# Altium PCB Controller.PcbDoc
Units mm, origin at the board's own origin, x right, y up, seen from the top; angles counter-clockwise.
Board outline 60.32 x 65.41 mm, 2 copper layers (Top Layer, Bottom Layer); 34 components, 35 nets, 142 pads, 0 vias.
Unrouted connection lines stored in the file: 78.
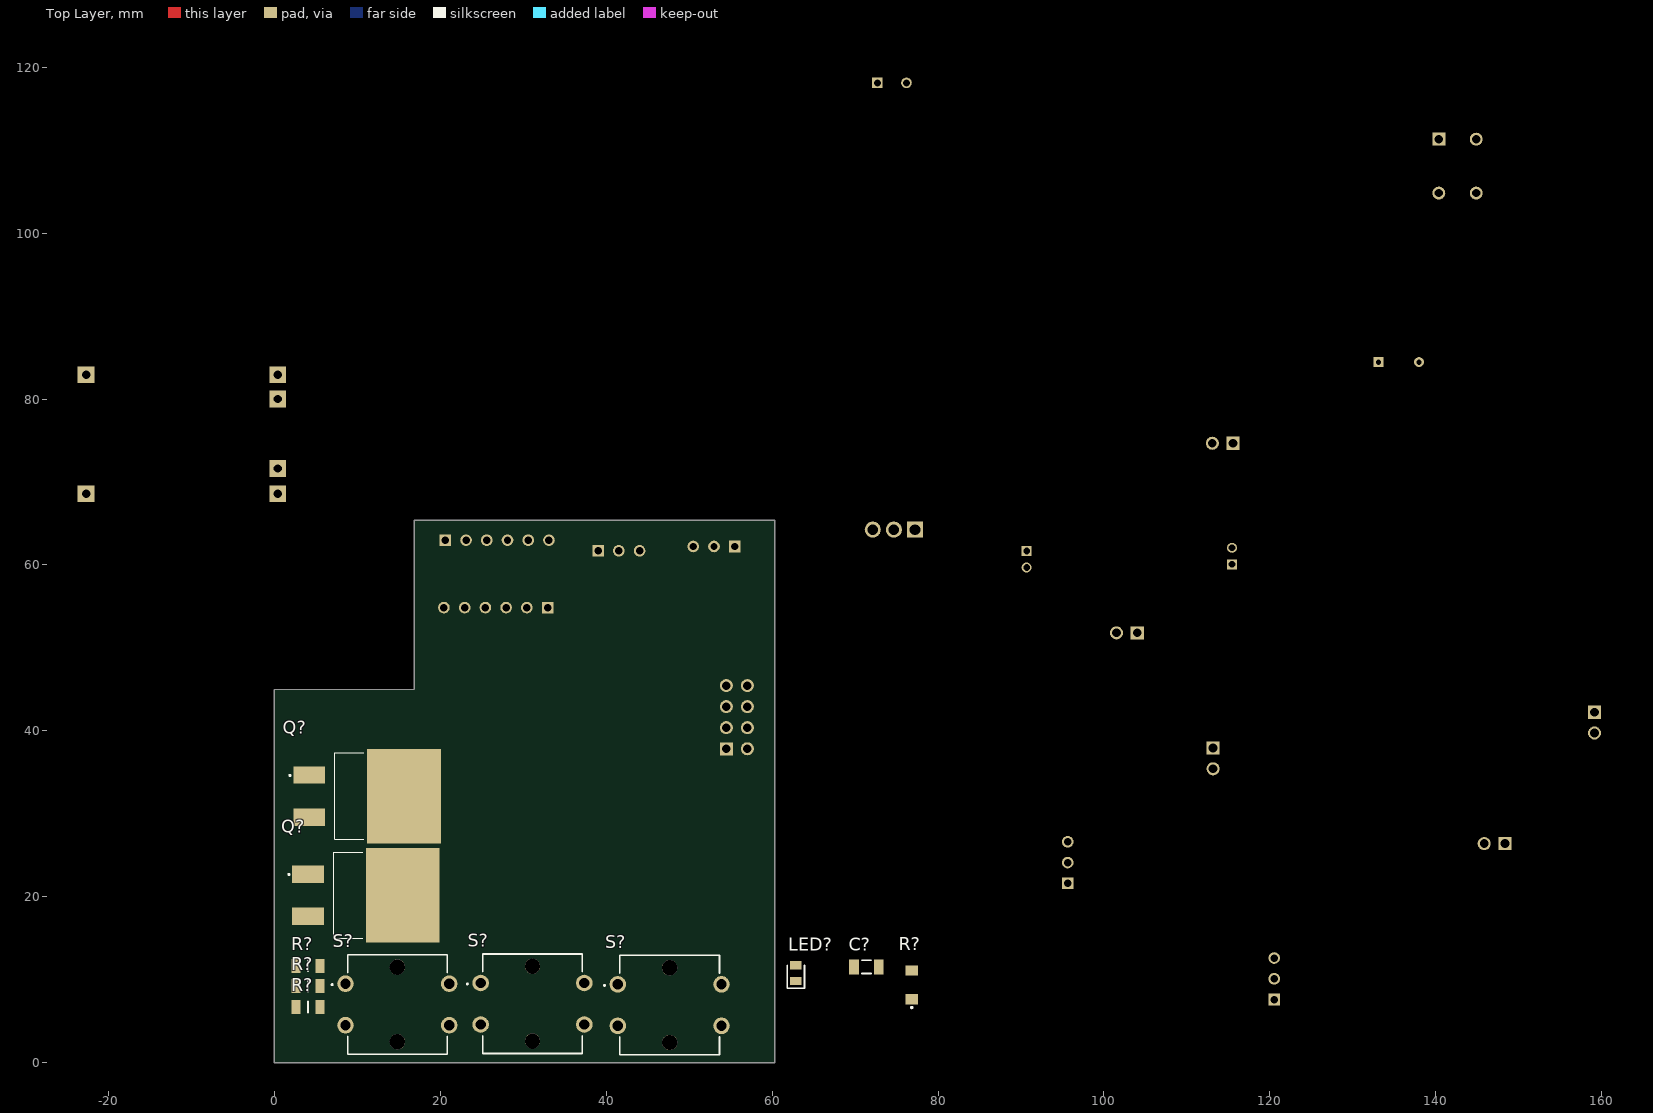
[diagram p0: Top Layer view]
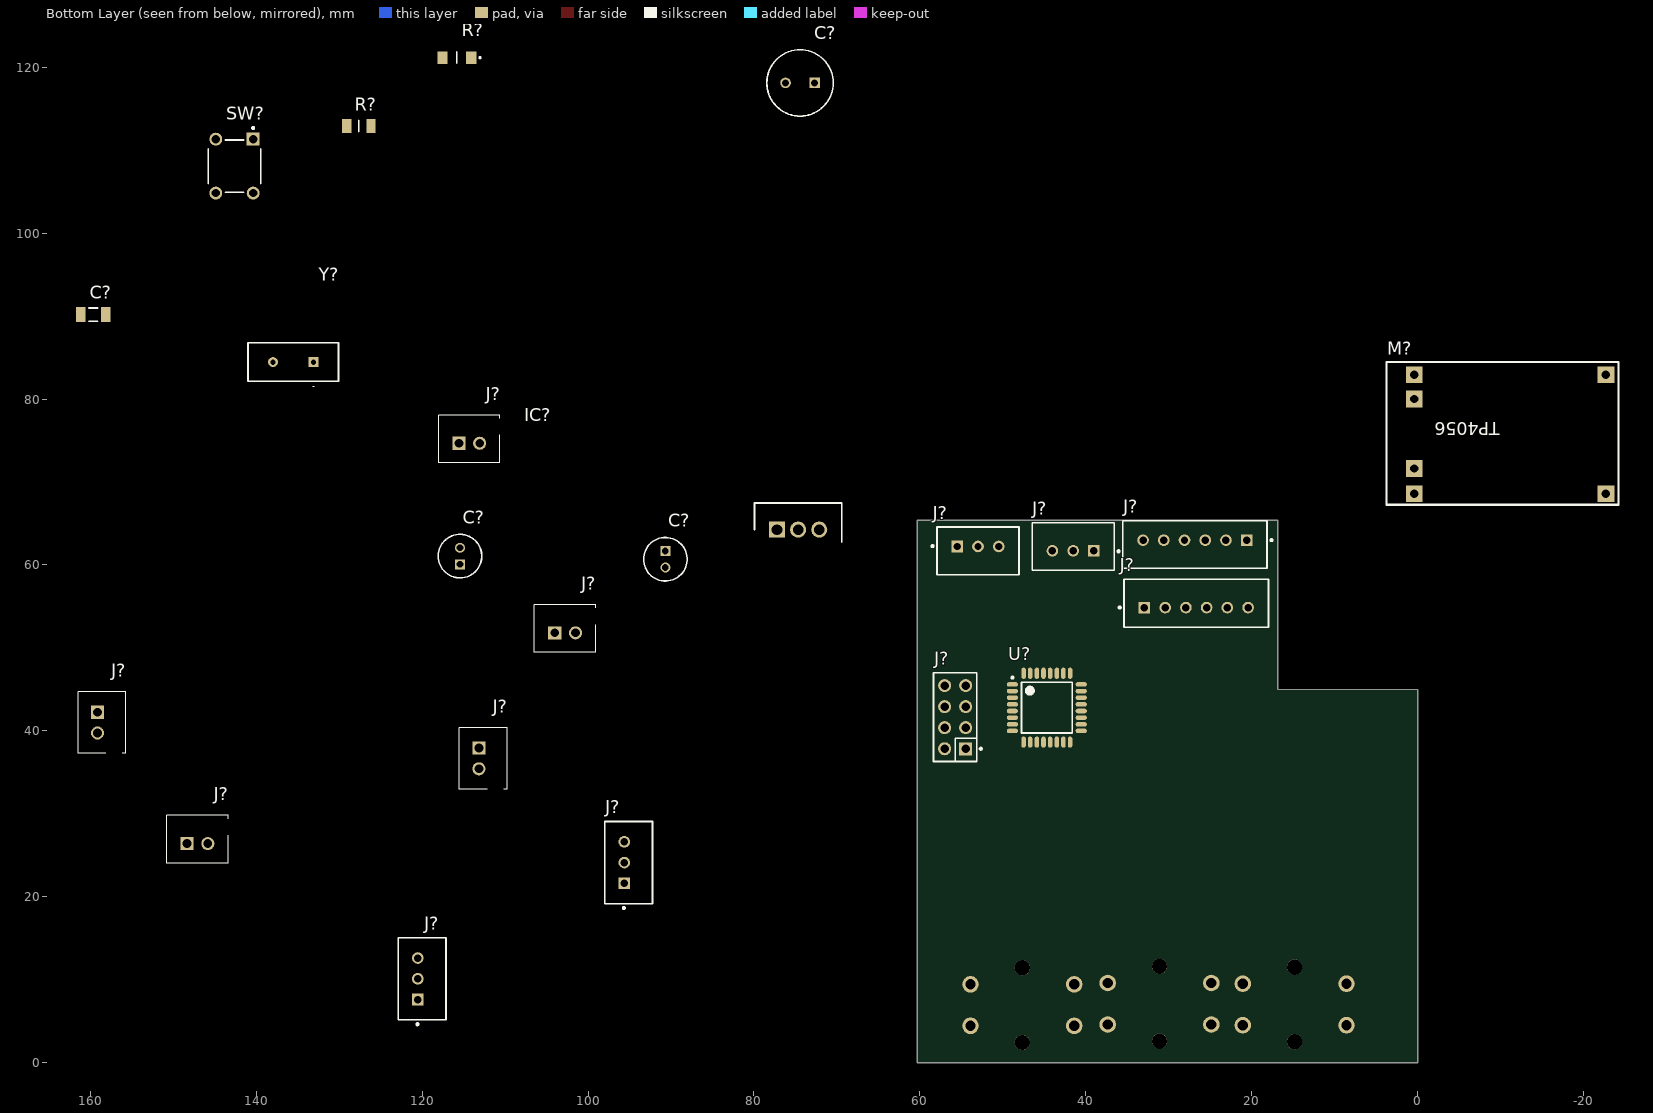
[diagram p1: Bottom Layer view, seen from below]

## Layer stack, top to bottom
Top Solder: solder mask 0.0102, Solder Resist, Dk 3.5
Top Layer: signal copper 0.0356
Dielectric 1: dielectric 0.32, FR-4, Dk 4.8
Bottom Layer: signal copper 0.0356
Bottom Solder: solder mask 0.0102, Solder Resist, Dk 3.5

## Board outline
0,0 60.325,0 60.325,65.405 16.891,65.405 16.891,45.016 0,44.958

## Design rules (kind name [scope] priority, off if disabled: settings)
Clearance [All] p1: gap=0.254 ignorepadtopadclearanceinfootprint=FALSE
PolygonConnect [All] p1: connectstyle=Relief reliefconductorwidth=0.254 reliefentries=4 polygonreliefangle="90 Angle" airgapwidth=0.254
RoutingVias [All] p1: holewidth=0.711 width=1.27 viastyle="Through Hole" minholewidth=0.711 minwidth=1.27 maxholewidth=0.711 maxwidth=1.27
SolderMaskExpansion [All] p1: expansion=0.102 istentingtop=FALSE
Width [All] p1: maxlimit=0.254 minlimit=0.254 preferedwidth=0.254
30 further rules are at their usual default settings.

## Classes and differential pairs
component class Controller: C? IC? J? LED? M? Q? R? S? SW? U? Y?

## Components (designator, comment, footprint, x,y, rotation, side; value= is the part's Value field where it differs from the comment)
C? "CAP 22pF 50V 1206(3216)" CAPC1206(3216)100_N 71.374,11.557 r0 top value=22pF
C? "0.33uf" CAPPRD200W60D525H1250 90.678,61.69 r270 bottom
C? "0.1uf" CAPPRD200W60D525H1250 115.443,60.071 r90 bottom
C? "870585574003" CAPPRD350W65D800H1300 72.7,118.11 r0 bottom
C? "CAP 22pF 50V 1206(3216)" CAPC1206(3216)100_N 159.639,90.17 r0 bottom value=22pF
IC? "LM7805" TO254P470X1028X1955-3P 77.216,64.262 r180 bottom
J? "Buck In" B2BXHAMLFSN 148.336,26.416 r180 bottom
J? "B3B-XH-A(LF)(SN)" FP-B3B-XH-A_LF_SN-MFG 119.998,10.12 r90 bottom
J? "B3B-XH-A(LF)(SN)" FP-B3B-XH-A_LF_SN-MFG 95.106,24.13 r90 bottom
J? "Buck out" B2BXHAMLFSN 115.57,74.676 r180 bottom
J? "Buzzer" B2BXHAMLFSN 104.013,51.816 r180 bottom
J? "Switch" B2BXHAMLFSN 159.131,42.251 r270 bottom
J? "B3B-XH-A(LF)(SN)" FP-B3B-XH-A_LF_SN-MFG 52.999,61.705 r180 bottom
J? "B3B-XH-A(LF)(SN)" FP-B3B-XH-A_LF_SN-MFG 41.529,62.23 r0 bottom
J? "Battery" B2BXHAMLFSN 113.157,37.933 r270 bottom
J? "B6B-XH-A(LF)(SN)" FP-B6B-XH-A_LF_SN-MFG 26.857,62.467 r0 bottom
J? "MALE-2.54-6P" FP-PBC04DAAN-MFG 55.753,41.656 r90 bottom
J? "B6B-XH-A(LF)(SN)" FP-B6B-XH-A_LF_SN-MFG 26.69,55.389 r180 bottom
LED? "LED SMD 0805" LEDC2012X80N 62.865,10.795 r90 top
M? "TP4056Module" TP4056Module -24.22,84.455 r0 bottom
Q? "IRLZ44NSTRLPBF" IRF2804STRLPBF 8.814,20.193 r270 top
Q? "IRLZ44NSTRLPBF" IRF2804STRLPBF 8.941,32.131 r270 top
R? "330 5%" ERJP08D1000V 76.835,9.398 r90 top
R? "10k 5%" RESC3116X70N 4.064,9.271 r180 top
R? "10k 5%" RESC3116X70N 4.064,6.731 r180 top
R? "10k 5%" RESC3116X70N 4.064,11.684 r0 top
R? "10k 5%" RESC3116X70N 127.635,112.903 r0 bottom
R? "150 1%" ERJ8ENF1000V 115.824,121.158 r0 bottom
S? "B3F-5050" B3F-4055 14.832,7.025 r180 top
S? "B3F-5050" B3F-4055 47.652,6.945 r180 top
S? "B3F-5050" B3F-4055 31.115,7.112 r180 top
SW? "1825967-2" FP-1825967-2-MFG 142.621,108.077 r180 bottom
U? "ATmega328-AU" 32A_L 44.704,42.799 r180 bottom
Y? "HC49S-8-30-50-70-30-ATF" HC49S830507030ATF 133.096,84.455 r90 bottom

## Footprints (in the part's own frame and the unit in brackets; to place one, negate y for a bottom-side part, rotate by r counter-clockwise, add the part's x,y. Pads: shape width x height; smd on the part's side, far side on the other; paste and mask are expansions set on the pad)
32A_L [mm] "Thin QFP, 32-Leads, Body 7x7mm, Pitch 0.8mm, IPC High Density"
  oval 1.35x0.55 smd: 1(-4.15,2.8) 2(-4.15,2) 3(-4.15,1.2) 4(-4.15,0.4) 5(-4.15,-0.4) 6(-4.15,-1.2) 7(-4.15,-2) 8(-4.15,-2.8) 17(4.15,-2.8) 18(4.15,-2) 19(4.15,-1.2) 20(4.15,-0.4) 21(4.15,0.4) 22(4.15,1.2) 23(4.15,2) 24(4.15,2.8)
  oval 0.55x1.35 smd: 9(-2.8,-4.15) 10(-2,-4.15) 11(-1.2,-4.15) 12(-0.4,-4.15) 13(0.4,-4.15) 14(1.2,-4.15) 15(2,-4.15) 16(2.8,-4.15) 25(2.8,4.15) 26(2,4.15) 27(1.2,4.15) 28(0.4,4.15) 29(-0.4,4.15) 30(-1.2,4.15) 31(-2,4.15) 32(-2.8,4.15)
  silkscreen extent -4.28,-3.05 3.05,3.75, body extent -3.5,-3.5 3.5,3.5, height 1.2
B2BXHAMLFSN [mm]
  rect 1.575x1.575 hole 1.05: 1(0,0)
  round 1.575 hole 1.05: 2(2.5,0)
  round 0.65 hole 1.3 unplated: MH1(4.1,2)
  silkscreen extent -2.45,-2.35 4.95,3.4, body extent -2.45,-2.36 4.95,3.39, height 6.9
B3F-4055 [mm]
  round 2 hole 1.25: 1(6.25,-2.5) 2(-6.25,-2.5) 3(6.25,2.5) 4(-6.25,2.5)
  round 1.85 hole 1.85 unplated: 5(0,4.5) 6(0,-4.5)
  silkscreen extent -6,-6 7.94,6, body extent -6.9,-6.05 6.9,6.05, height 7.3
CAPC1206(3216)100_N [mm] "Chip Capacitor, Body 3.2x1.6mm, Height 1mm, IPC Medium Density"
  rect 1.15x1.8 smd: 1(-1.5,0) 2(1.5,0)
  silkscreen extent -0.55,-0.8 0.55,0.8, body extent -1.7,-0.9 1.7,0.9, height 1
CAPPRD200W60D525H1250 [mm]
  rect 1.2x1.2 hole 0.8: 1(0,0)
  round 1.2 hole 0.8: 2(2,0)
  silkscreen extent -1.62,-2.63 3.62,2.62, body extent -1.74,-2.75 3.75,2.75, height 12.5
CAPPRD350W65D800H1300 [mm]
  rect 1.275x1.275 hole 0.85: 1(0,0)
  round 1.275 hole 0.85: 2(3.5,0)
  silkscreen extent -2.25,-4 5.75,4, body extent -2.49,-4.25 6,4.25, height 13
ERJ8ENF1000V [mm]
  rect 1.25x1.5 smd: 1(-1.725,0) 2(1.725,0)
  silkscreen extent -2.9,-0.67 0,0.67, body extent -1.6,-0.8 1.6,0.8, height 0.6
ERJP08D1000V [mm]
  rect 1.25x1.5 smd: 1(-1.725,0) 2(1.725,0)
  silkscreen extent -2.85,-0.1 -2.65,0.1, body extent -1.6,-0.8 1.6,0.8, height 0.6
FP-1825967-2-MFG [mm]
  rect 1.55x1.55 hole 1 paste-2539.97 mask+0: 1(2.25,3.25)
  round 1.55 hole 1 paste-2539.97 mask+0: 2(2.25,-3.25) 3(-2.25,3.25) 4(-2.25,-3.25)
  silkscreen extent -3.15,-3.15 3.15,4.72, body extent -3,-3.9 3,3.9, height 8
FP-B3B-XH-A_LF_SN-MFG [mm]
  rect 1.4x1.4 hole 0.9 paste-2539.97 mask+0: 1(-2.5,0.525)
  round 1.4 hole 0.9 paste-2539.97 mask+0: 2(0,0.525) 3(2.5,0.525)
  silkscreen extent -5.6,-2.88 4.95,2.88, body extent -4.95,-2.88 4.95,2.89, height 7
FP-B6B-XH-A_LF_SN-MFG [mm]
  rect 1.4x1.4 hole 0.9 paste-2539.97 mask+0: 1(-6.25,-0.525)
  round 1.4 hole 0.9 paste-2539.97 mask+0: 2(-3.75,-0.525) 3(-1.25,-0.525) 4(1.25,-0.525) 5(3.75,-0.525) 6(6.25,-0.525)
  silkscreen extent -9.35,-2.88 8.7,2.88, body extent -8.7,-2.98 8.7,2.88, height 7
FP-PBC04DAAN-MFG [mm]
  rect 1.57x1.57 hole 1.02 paste-2539.97 mask+0: 1(-3.81,-1.27)
  round 1.57 hole 1.02 paste-2539.97 mask+0: 2(-3.81,1.27) 3(-1.27,-1.27) 4(-1.27,1.27) 5(1.27,-1.27) 6(1.27,1.27) 7(3.81,-1.27) 8(3.81,1.27)
  silkscreen extent -5.34,-3.22 5.34,2.61, body extent -5.08,-2.54 5.08,2.54, height 8.71
HC49S830507030ATF [mm]
  rect 1.192x1.192 hole 0.65: 1(0,0)
  round 1.192 hole 0.65: 2(0,4.88)
  silkscreen extent -3,-3.01 2.32,7.89, body extent -2.32,-3.01 2.32,7.89, height 4.1
IRF2804STRLPBF [mm]
  rect 2.08x3.81 smd: 1(-2.54,-4.75) 3(2.54,-4.75)
  rect 11.43x8.89 smd: 2(0,6.68)
  silkscreen extent -5.21,-7.15 5.21,1.85, body extent -4.82,-5.95 4.82,9.92, height 4.19
LEDC2012X80N [mm]
  rect 1x1.4 smd: 1(-0.95,0) 2(0.95,0)
  silkscreen extent -1.8,-1.05 0.95,1.05
RESC3116X70N [mm]
  rect 1.1x1.7 smd: 1(-1.45,0) 2(1.45,0)
  silkscreen extent 0,-0.67 0,0.67, body extent -1.56,-0.77 1.56,0.77, height 0.7
TO254P470X1028X1955-3P [mm]
  rect 1.935x1.935 hole 1.29: 1(0,0)
  round 1.935 hole 1.29: 2(2.54,0) 3(5.08,0)
  silkscreen extent -2.73,-1.5 7.81,3.2, body extent -2.53,-1.72 7.63,2.85, height 18.74
TP4056Module [mil]
  rect 78.74x78.74 hole 40: 1(60,625) 2(60,60) 3(970,625) 4(970,505) 5(970,175) 6(970,60)
  silkscreen extent 0,0 1102,677, body extent -46,-3 1107,683, height 163

## Part data
C? C?: library part CMP-1037-00973-1, "CAP 22pF 50V ±1% 1206 (3216 Metric) Thickness 1mm SMD", Case-EIA=1206, Case-Metric=3216, Rated Voltage="50 V", Tolerance=Â±1%, Max Thickness="1 mm", Technology=SMT
C? C?: library part UFG1HR33MDM1TD, "Capacitor Polarised", Manufacturer_Name=Nichicon, Mouser Part Number=647-UFG1HR33MDM1TD, Datasheet Link=http://nichicon-us.com/english/products/pdfs/e-ufg.pdf, Height=12.5mm, Manufacturer_Part_Number=UFG1HR33MDM1TD, Mouser Price/Stock=https://www.mouser.com/Search/Refine.aspx?Keyword=647-UFG1HR33MDM1TD
C?: "Capacitor Polarised", Manufacturer_Name="Wurth Elektronik", Mouser Part Number=710-870585574003, Datasheet Link=https://www.we-online.com/components/products/datasheet/870585574003.pdf, Height=13mm, Manufacturer_Part_Number=870585574003, Mouser Price/Stock=https://www.mouser.co.uk/ProductDetail/Wurth-Elektronik/870585574003?qs=9vOqFld9vZUAYLebAKp6%2Fg%3D%3D
IC?: library part LM7805CT_NOPB, "Integrated Circuit", Arrow Part Number=LM7805CT/NOPB, Manufacturer_Name="Texas Instruments", Mouser Part Number=926-LM7805CT/NOPB, Arrow Price/Stock=https://www.arrow.com/en/products/lm7805ctnopb/texas-instruments?region=europe, Datasheet Link=http://www.ti.com/lit/gpn/lm7800, Height=4.7mm, Manufacturer_Part_Number=LM7805CT/NOPB, Mouser Price/Stock=https://www.mouser.co.uk/ProductDetail/Texas-Instruments/LM7805CT-NOPB?qs=OYMYEaN9QmBS2GvaX6GSkQ%3D%3D
J? J? J? J? J?: library part B2B-XH-AM_LF__SN_, "Connector", Arrow Part Number=B2B-XH-AM(LF)(SN), Manufacturer_Name="JST (JAPAN SOLDERLESS TERMINALS)", Arrow Price/Stock=https://www.arrow.com/en/products/b2b-xh-am-lf-sn/jst-manufacturing?region=europe, Datasheet Link=https://www.jst-mfg.com/product/pdf/eng/eXH.pdf, Height=7mm, Manufacturer_Part_Number=B2B-XH-AM(LF)(SN)
J? J? J? J?: library part CMP-17439-000014-3, "CONN HEADER VERT 3POS 2.5MM", Color=Natural, Contact Resistance=20mR, Current Rating=3A, Flammability Rating="UL94 V-0", Housing Color=White, Insulation Resistance=1GR, Max Operating Temperature=85°C, Max Voltage Rating (AC)=250V, Min Operating Temperature=-25°C, Connector Type=Header, Contact Finish - Mating=TIN, Contact Material=Brass, Contact Plating=Tin, Contact Shape=Square, Contact Type="Male Pin", Depth=5.75mm, Fastening Type=Detent, Gender=Male, Housing Material=Polyamide, Insulation Color=Natural, Insulation Material=Nylon, Lead Free="Lead Free", Lead Pitch=2.5mm, Length=9.9mm, Max Current Rating=3A, Max Voltage Rating (DC)=250V, Mount="Through Hole", Number Of Contacts=3, Number of Positions=3, Number Of Rows=1, Orientation=Straight, Packaging=Bulk, Pitch=2.5mm, REACH SVHC="No SVHC", Series=XH, Termination=Solder, Voltage Rating=250V, Voltage Rating (AC)=250V, Wire/Cable Gauge=22AWG
J? J?: library part CMP-17439-000076-1, "CONN HEADER VERT 6POS 2.5MM"
J?: "Male Header Connector 2.54mm 6 Pins.", JLCPCB PN=C492405
LED?: library part SML-LXT0805IW-TR, "LED", Manufacturer_Name=Lumex, Mouser Part Number=696-SML-LXT0805IW, Arrow Part Number=SML-LXT0805IW-TR, Arrow Price/Stock=https://www.arrow.com/en/products/sml-lxt0805iw-tr/lumex, Datasheet Link=http://uk.rs-online.com/web/p/products/8886313, Height=0.8mm, Manufacturer_Part_Number=SML-LXT0805IW-TR, Mouser Price/Stock=https://www.mouser.co.uk/ProductDetail/Lumex/SML-LXT0805IW-TR?qs=9HInCHf8eFgASaxWaq368w%3D%3D
M?: "Module for managing battery charging"
Q? Q?: "MOSFET (N-Channel)", Manufacturer_Name=Infineon, Mouser Part Number=942-IRLZ44NSTRLPBF, Arrow Part Number=IRLZ44NSTRLPBF, Arrow Price/Stock=https://www.arrow.com/en/products/irlz44nstrlpbf/infineon-technologies-ag?region=nac, Datasheet Link=https://www.infineon.com/dgdl/irlz44nspbf.pdf?fileId=5546d462533600a40153567221272727, Height=4.83mm, Manufacturer_Part_Number=IRLZ44NSTRLPBF, Mouser Price/Stock=https://www.mouser.co.uk/ProductDetail/Infineon-Technologies/IRLZ44NSTRLPBF?qs=9%252BKlkBgLFf1LijFJvUznEg%3D%3D
R?: library part ERJP08J331V, "Resistor", Manufacturer_Name=Panasonic, Datasheet Link=http://industrial.panasonic.com/cdbs/www-data/pdf/RDA0000/AOA0000C102.pdf, Height=0.7mm, Manufacturer_Part_Number=ERJP08J331V
R? R? R? R?: library part ERJ-8GEYJ103V, "Resistor", Manufacturer_Name=Panasonic, Mouser Part Number=667-ERJ-8GEYJ103V, Arrow Part Number=ERJ-8GEYJ103V, Arrow Price/Stock=https://www.arrow.com/en/products/erj-8geyj103v/panasonic?region=nac, Datasheet Link=https://4donline.ihs.com/images/VipMasterIC/IC/PANA/PANA-S-A0009891627/PANA-S-A0009891627-1.pdf?hkey=52A5661711E402568146F3353EA87419, Height=0.7mm, Manufacturer_Part_Number=ERJ-8GEYJ103V, Mouser Price/Stock=https://www.mouser.co.uk/ProductDetail/Panasonic/ERJ-8GEYJ103V?qs=IZrxGxQQvkNYuW0TYiASIA%3D%3D
R?: library part ERJ-8ENF1500V, "Resistor", Manufacturer_Name=Panasonic, Mouser Part Number=667-ERJ-8ENF1500V, Arrow Part Number=ERJ-8ENF1500V, Arrow Price/Stock=https://www.arrow.com/en/products/erj-8enf1500v/panasonic?region=nac, Datasheet Link=https://industrial.panasonic.com/cdbs/www-data/pdf/RDA0000/AOA0000C86.pdf, Height=0.7mm, Manufacturer_Part_Number=ERJ-8ENF1500V, Mouser Price/Stock=https://www.mouser.co.uk/ProductDetail/Panasonic/ERJ-8ENF1500V?qs=JjxTDIFmKPTW8QBP1YAtHw%3D%3D
S? S? S?: "Switch", Manufacturer_Name="Omron Electronics", Mouser Part Number=653-B3F-5050, Arrow Part Number=B3F-5050, Arrow Price/Stock=https://www.arrow.com/en/products/b3f5050/omron?region=nac, Datasheet Link=https://omronfs.omron.com/en_US/ecb/products/pdf/en-b3f.pdf, Manufacturer_Part_Number=B3F-5050, Mouser Price/Stock=https://www.mouser.co.uk/ProductDetail/Omron-Electronics/B3F-5050?qs=dOLq8QE0Pqqk%2FO9x2OpTQw%3D%3D
SW?: library part CMP-03407-000013-1, "SWITCH TACTILE SPST-NO 0.05A 24V", Contact Current Rating=50mA, Contact Resistance=100mR, Max Operating Temperature=105°C, Max Voltage Rating (DC)=24V, Min Operating Temperature=-35°C, Operating Force=160gf, Package Quantity=750, Actuator Length=2.89mm, Actuator Material=Nylon, Contact Material="Copper Alloy", Contact Plating=Silver, Current Rating=50mA, Electrical Life=500000Cycles, Height=7.5mm, Illumination Type=Non-Illuminated, Length=5.99mm, Max Current Rating=50mA, Mechanical Life=500000Cycles, Mount="Through Hole", Orientation=Straight, Packaging="Loose Piece", Radiation Hardening=No, RoHS Compliant=Yes, Series="FSMCD, Alcoswitch", Switch Function=Off-Mom, Switch Travel=0.25mm, Termination="PC Pins", Throw Configuration=SPST, Type=Switch, Voltage Rating (DC)=24V
U?: library part CMP-0095-00261-2, "8-bit AVR Microcontroller, 32KB Flash, 1KB EEPROM, 2KB SRAM, 32-pin TQFP, Industrial Grade (-40°C to 85°C)", Code_JEDEC=MS-026-ABA, ComponentLink1Description="Manufacturer URL", ComponentLink1URL=http://www.atmel.com/, ComponentLink2Description="ATmega48A/48PA/88A/88PA/168A/168PA/328/328P Datasheet", ComponentLink2URL=http://www.atmel.com/dyn/resources/prod_documents/doc8271.pdf, ComponentLink3Description="ATmega48A/48PA/88A/88PA/168A/168PA/328/328P Summary", ComponentLink3URL=http://www.atmel.com/dyn/resources/prod_documents/8271S.pdf, DatasheetVersion="revD, May-2011", PackageDescription="32-Lead, 7x7x1.0 mm Body, 0.8mm Lead Pitch, Thin Profile Plastic Quad Flat Package (TQFP)", PackageReference=32A, PackageVersion="revC, Oct-2010", RevisionNote="DatasheetVersion & PackageVersion updated. URLs added."
Y?: "Crystal or Oscillator", Manufacturer_Name="Multicomp Pro", Datasheet Link=http://www.farnell.com/datasheets/2877048.pdf, Height=4mm, Manufacturer_Part_Number=HC49S-8-30-50-70-30-ATF

## Nets (pads, with @x,y where several pads share a name; then routed paths per layer and width w, separated by ;. In a path a pad name is that pad's centre, name@x,y a point inside that pad or via, vN(x,y) a via of type N, cw(c..) or ccw(c..) an arc to the next point about the centre after c; other vN are vias at no path point)
+5V: C?.1@115.443,60.071 IC?.3 J?.1@20.607,62.992 J?.1@32.94,54.864 J?.1@39.029,61.705 J?.1@95.631,21.63 J?.2@52.999,62.23 J?.3@120.523,12.62 R?.1@114.099,121.158 R?.2@129.085,112.903 S?.4 U?.4 U?.6 U?.18
A0: J?.2@41.529,61.705 U?.23
A1: J?.4@25.44,54.864 U?.24
A2: J?.2@23.107,62.992 U?.25
A3: J?.3@95.631,26.63 U?.26
DGND: Q?.2@15.621,32.131
GND: C?.1@69.874,11.557 C?.2@76.2,118.11 C?.2@90.678,59.69 C?.2@115.443,62.071 C?.2@161.139,90.17 IC?.2 J?.1@120.523,7.62 J?.2@95.631,24.13 J?.2@101.513,51.816 J?.2@113.07,74.676 J?.3@25.607,62.992 J?.5@30.607,62.992 LED?.1 Q?.3 R?.1@2.614,11.684 R?.1@5.514,6.731 R?.1@5.514,9.271 SW?.2 U?.3 U?.5 U?.21
NetC?_1: C?.1@72.7,118.11 J?.6@33.107,62.992 R?.2@117.549,121.158
NetC?_2: C?.2@72.874,11.557 U?.8 Y?.1
NetJ?_1: J?.1@113.157,37.933 M?.4
NetJ?_2: J?.2@113.157,35.433 M?.5
NetLED?_2: LED?.2 R?.1@76.835,7.673
PD2: J?.2@120.523,10.12 U?.32
PD3: J?.4@28.107,62.992 U?.1
PD4: J?.3@50.499,62.23 U?.2
PD5: J?.6@20.44,54.864 U?.9
PD6: J?.5@22.94,54.864 U?.10
PD7: R?.2@2.614,6.731 S?.1@8.582,9.525 U?.11
PD8: R?.2@2.614,9.271 S?.1@24.865,9.612 U?.12
PD9: R?.2@5.514,11.684 S?.1@41.402,9.445 U?.13
PD10: Q?.1@4.191,34.671 U?.14
PD11: Q?.1@4.064,22.733
PD11/MOSI: J?.2@57.023,37.846 U?.15
PD12/MISO: J?.1@54.483,37.846 U?.16
PD13/SCK: J?.1@104.013,51.816 J?.3@54.483,40.386 R?.2@76.835,11.123 U?.17
POUT+: J?.1@159.131,42.251 M?.3
POUT+SW: J?.2@145.836,26.416 J?.2@159.131,39.751
POUT-: J?.1@148.336,26.416 M?.6
RESET: J?.6@57.023,42.926 R?.1@126.185,112.903 SW?.3 U?.29
RXD: J?.4@57.023,40.386 U?.30
SDA: U?.27
SDL: U?.28
TXD: J?.5@54.483,42.926 U?.31
VCC: C?.1@90.678,61.69 IC?.1 J?.1@115.57,74.676
WGND: J?.1@55.499,62.23 J?.2@30.44,54.864 J?.3@27.94,54.864 J?.3@44.029,61.705 Q?.2@15.494,20.193
pads on no net: C?.1@158.139,90.17 J?.7 J?.8 J?.MH1 M?.1 M?.2 S?.2 S?.3 S?.5 S?.6 SW?.1 SW?.4 U?.7 U?.19 U?.20 U?.22 Y?.2

## Text inside footprints (layer, text, board x,y; h text height)
M?: Bottom Overlay "TP4056" at -9.869,77.216 h1.52 r180